# Altium PCB PCB.PcbDoc (part 1 of 3)
Units mm, origin at the board's own origin, x right, y up, seen from the top; angles counter-clockwise.
Board outline 145 x 65 mm, 4 copper layers (Top Layer, GND, VDD, Bottom Layer), stack 1.565 mm thick; 229 components, 167 nets, 739 pads, 265 vias.
Unrouted connection lines stored in the file: 1.
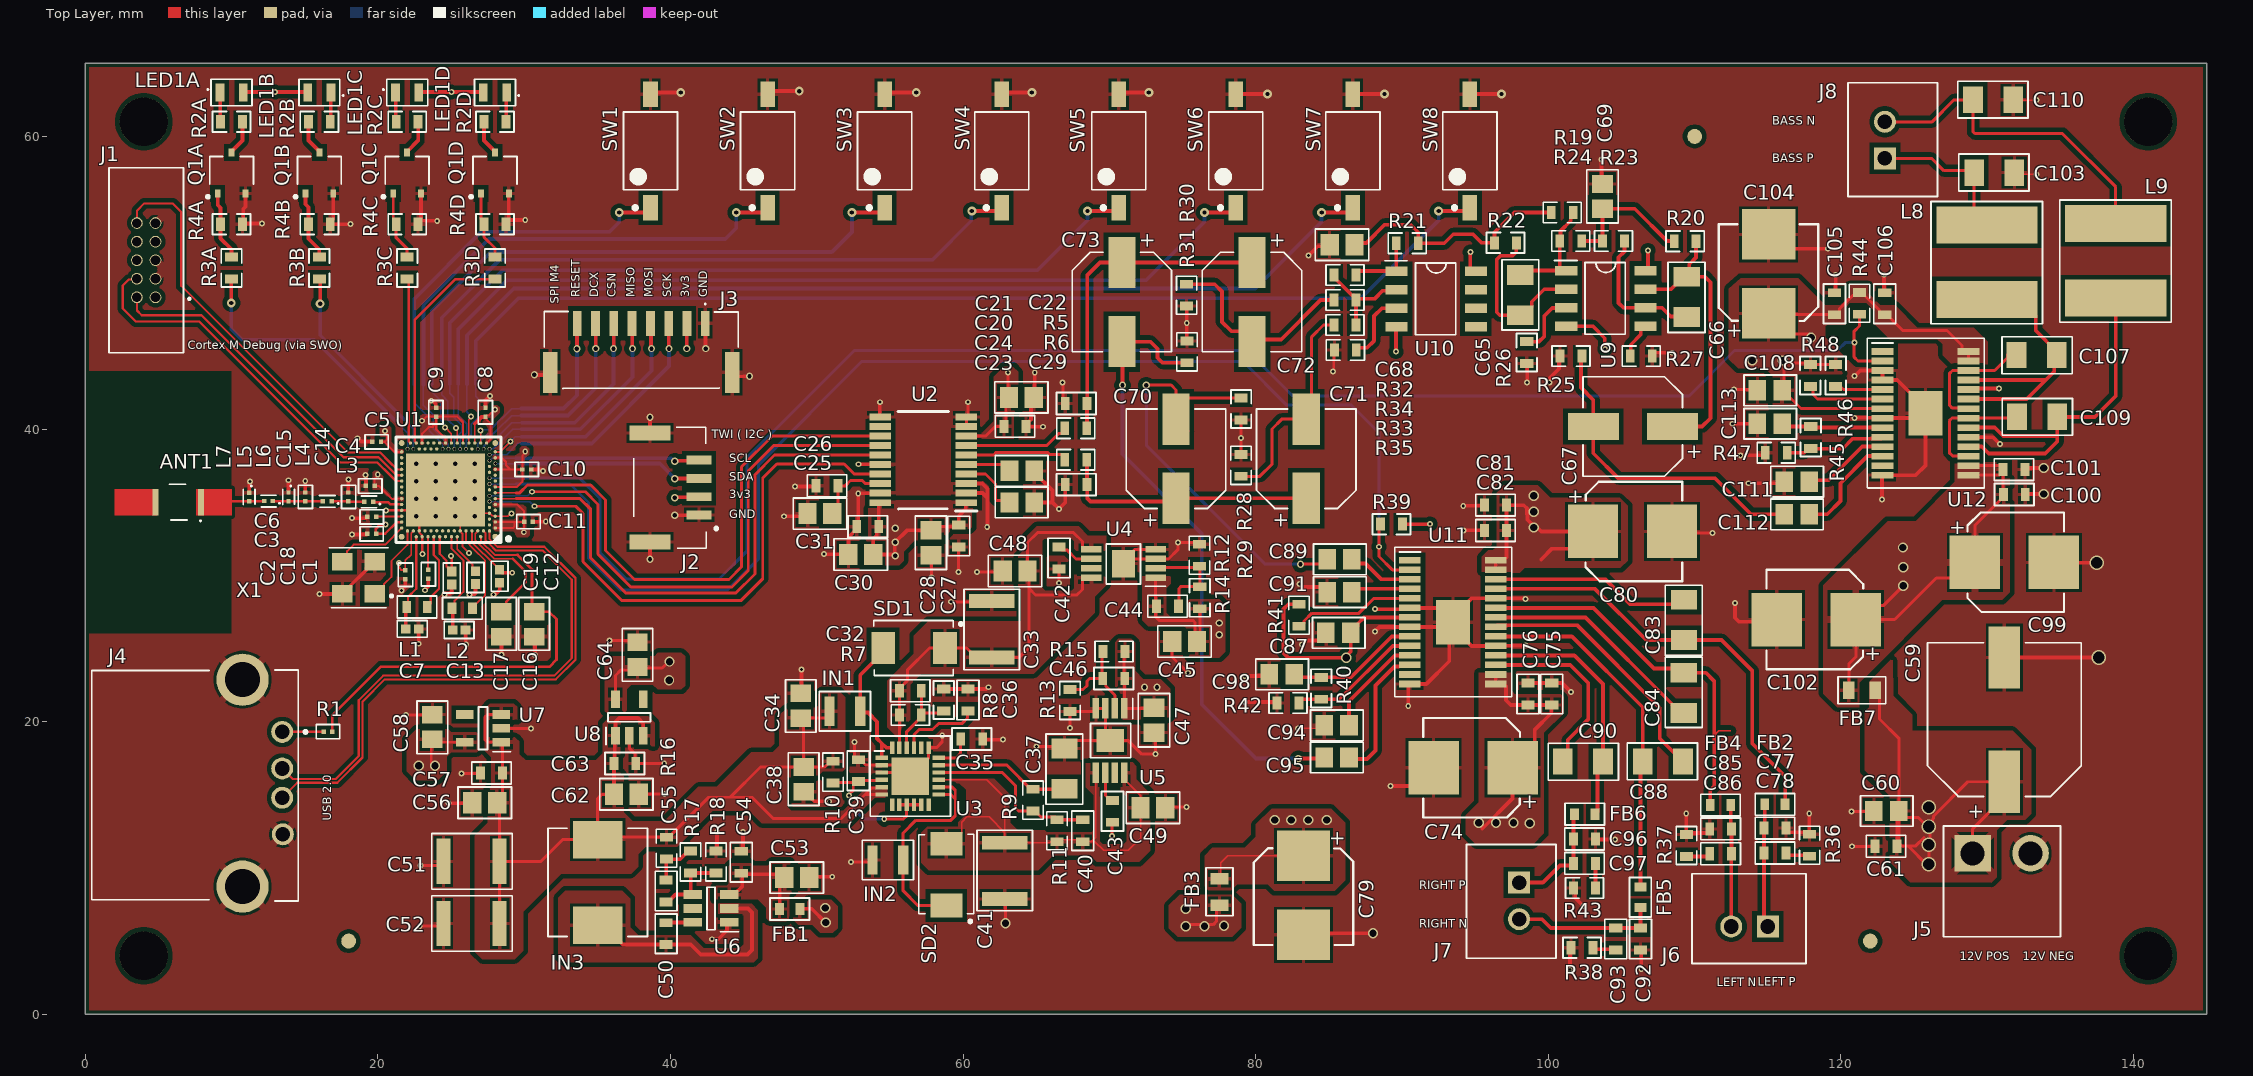
[diagram p0: Top Layer view]
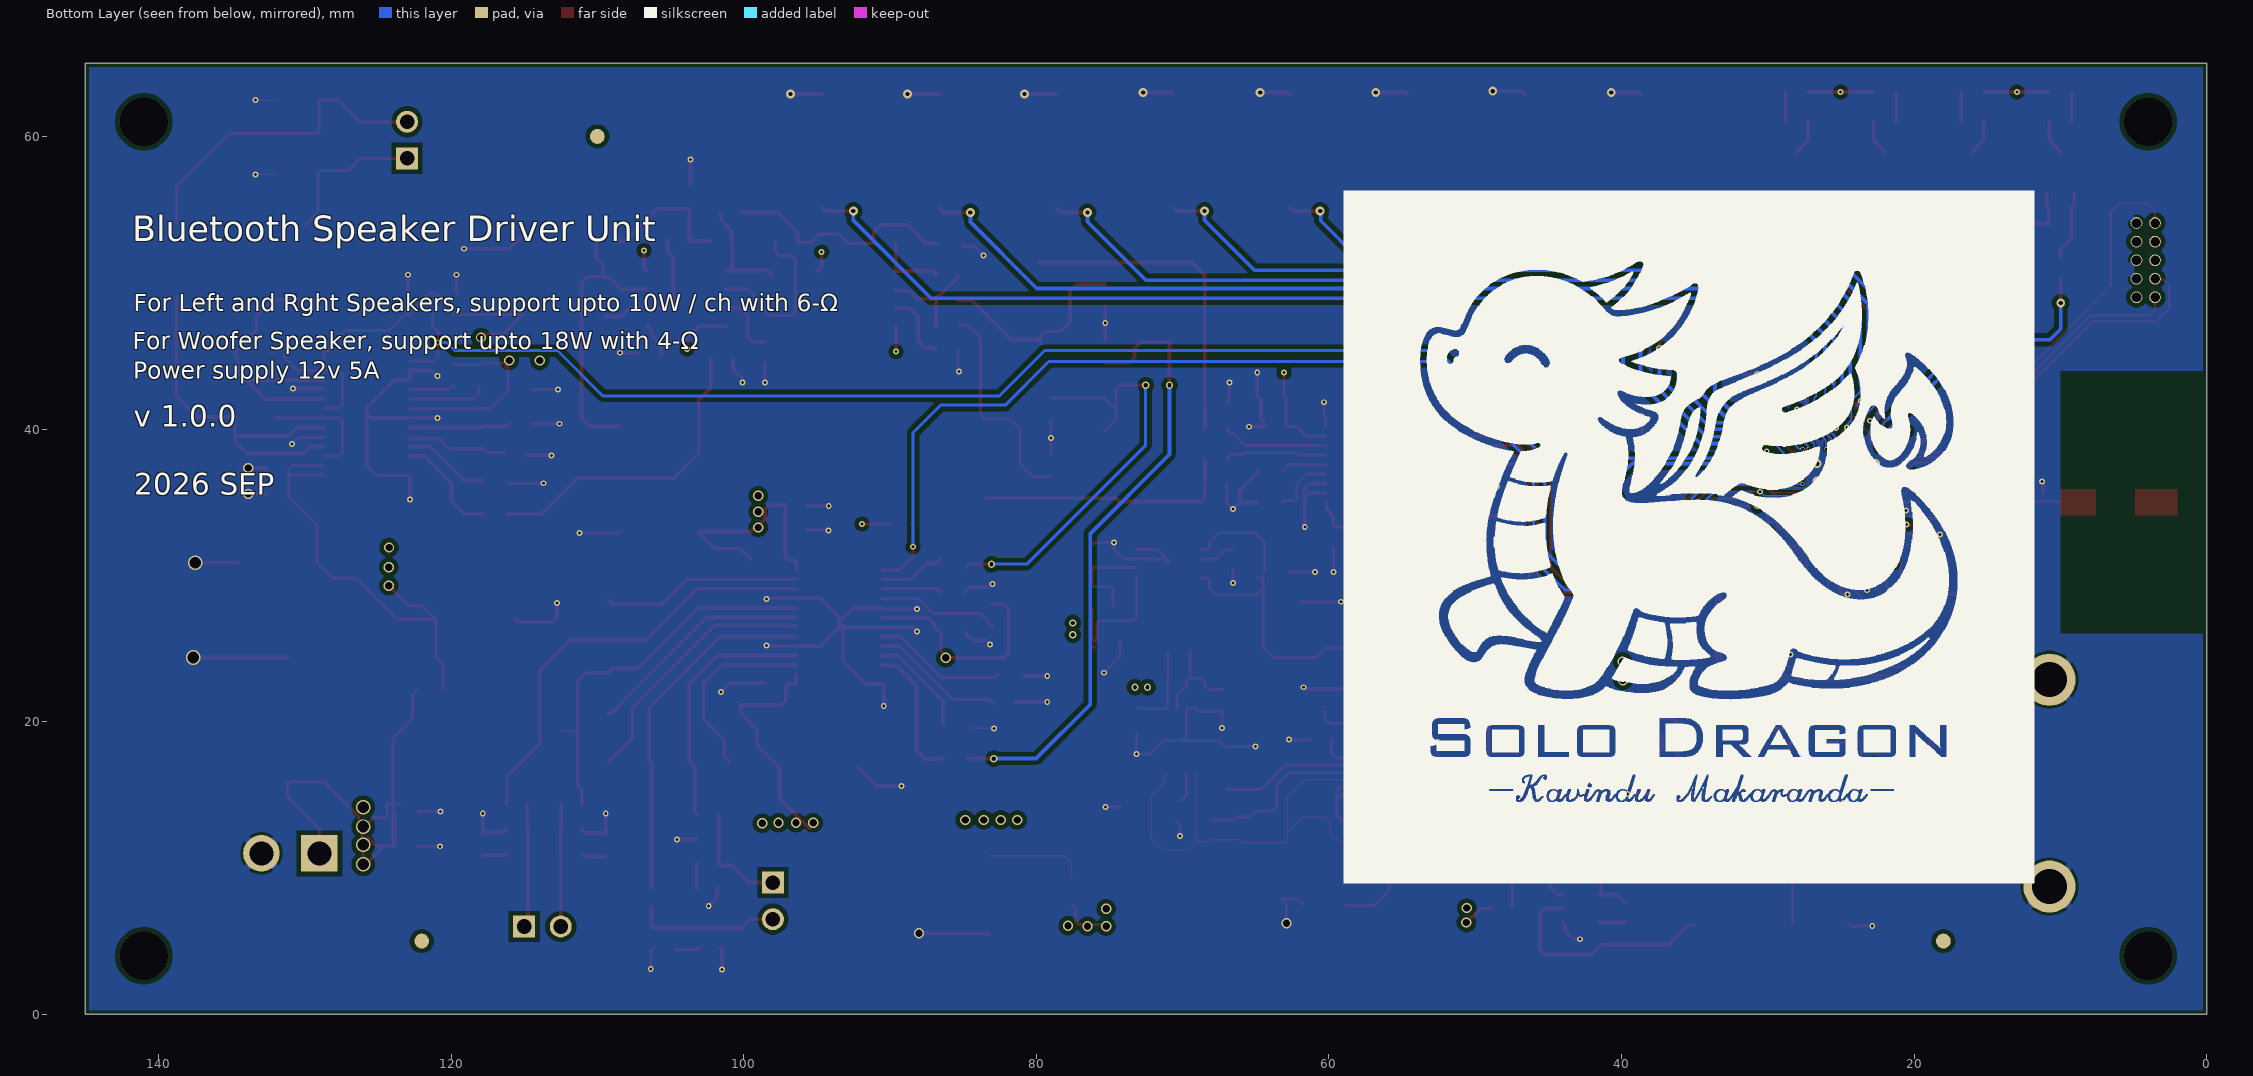
[diagram p1: Bottom Layer view, seen from below]
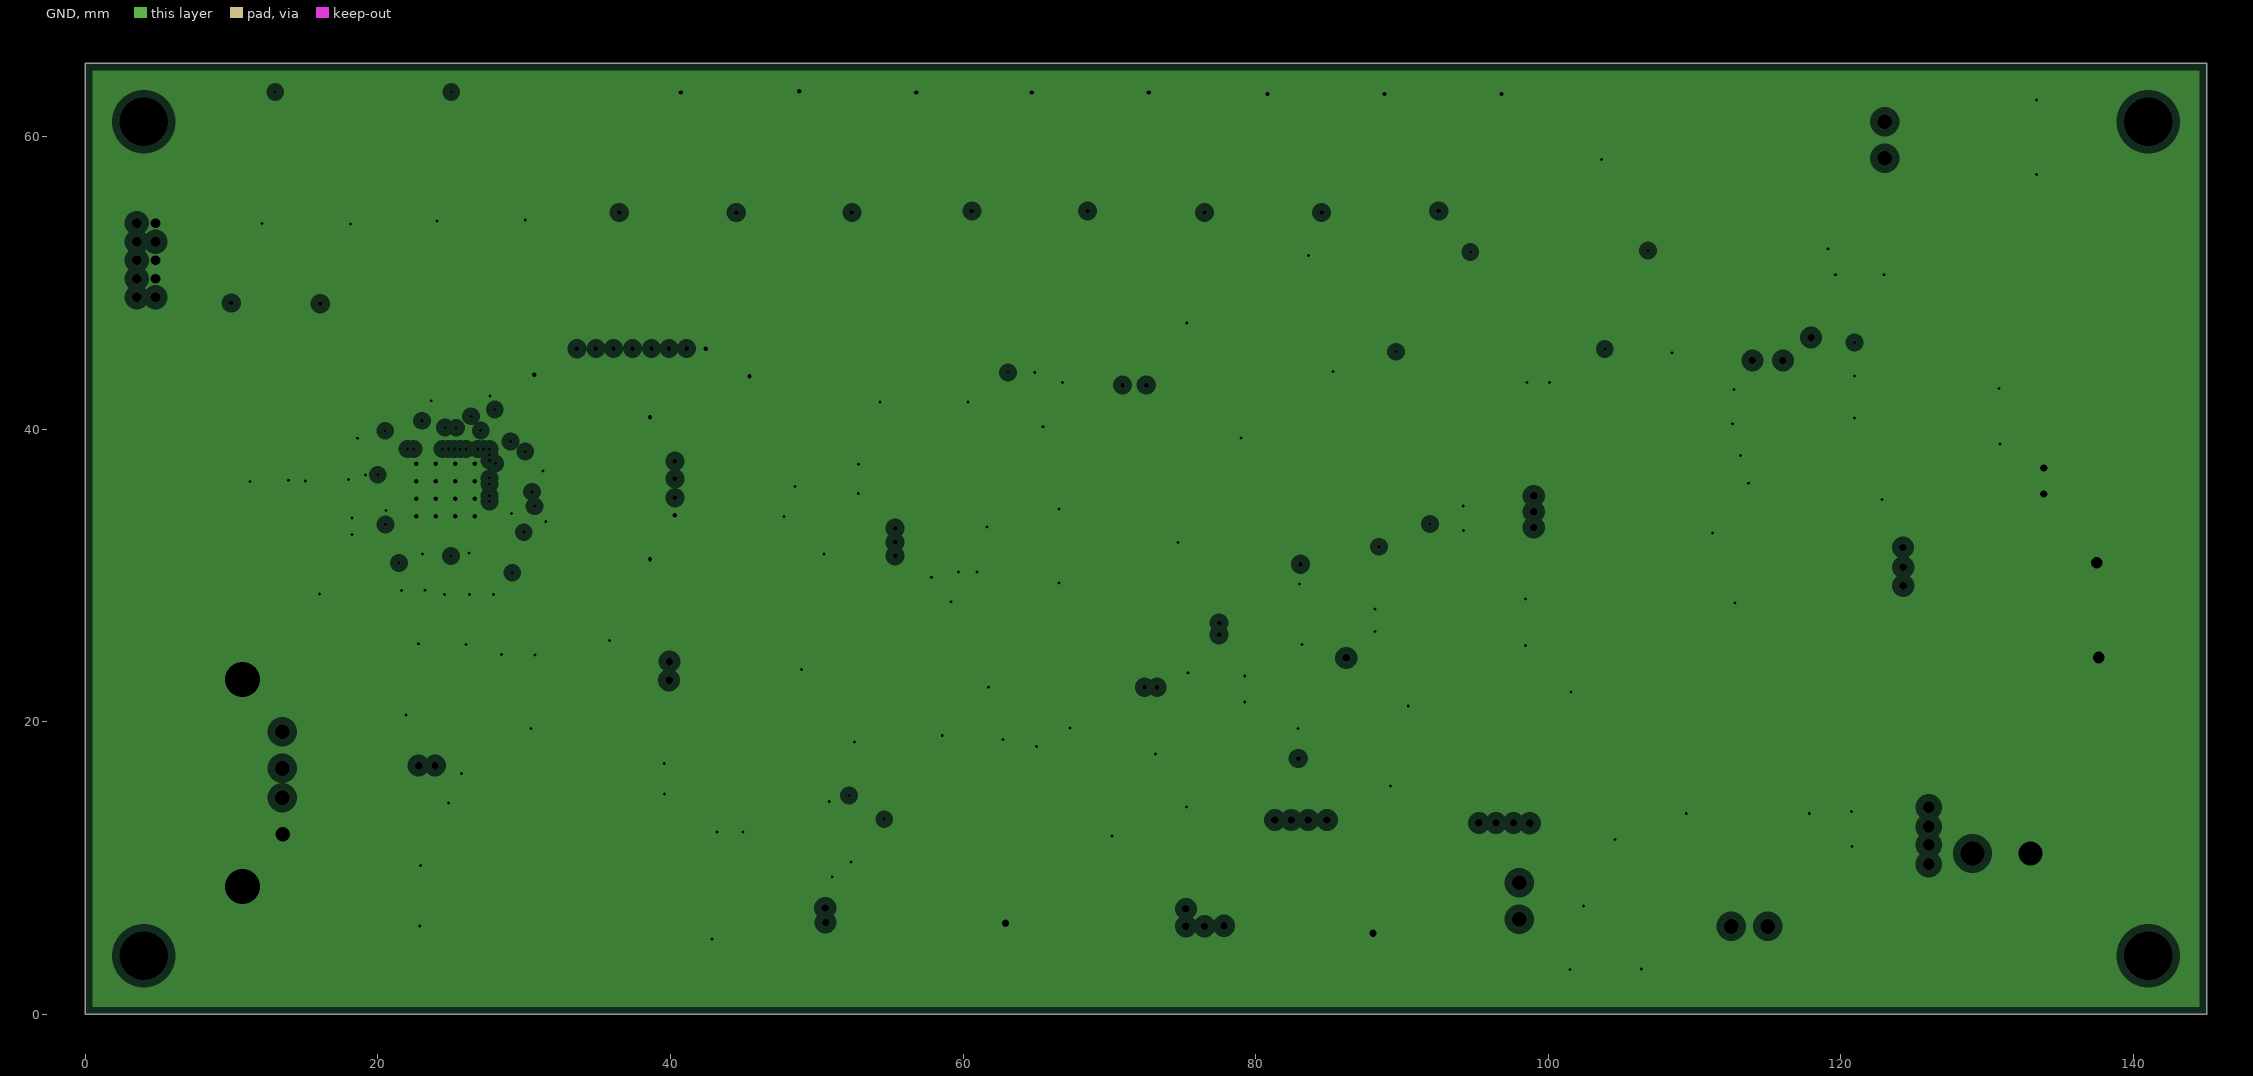
[diagram p2: GND, clearances drawn from the general rule]
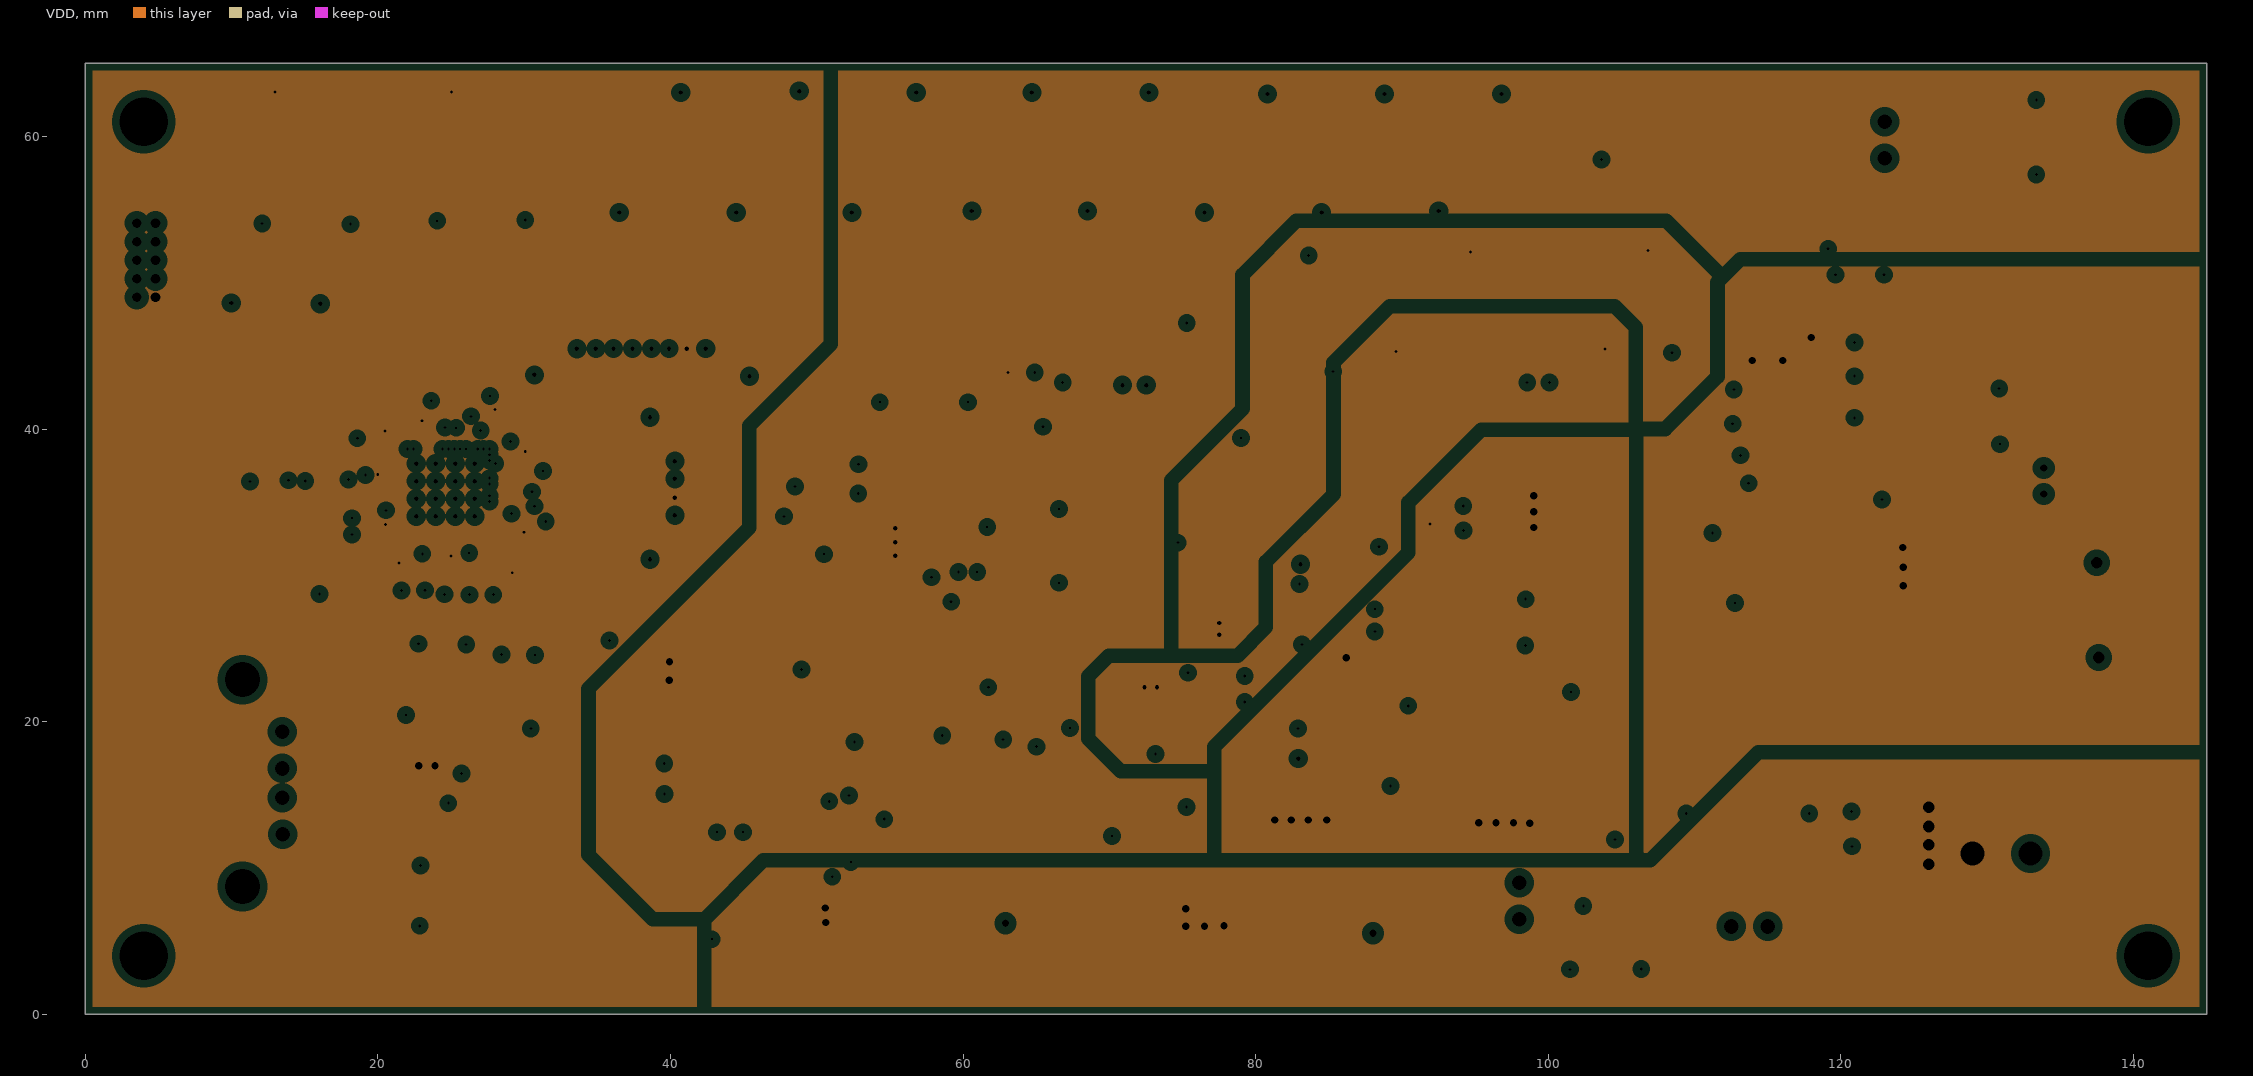
[diagram p3: VDD, clearances drawn from the general rule]
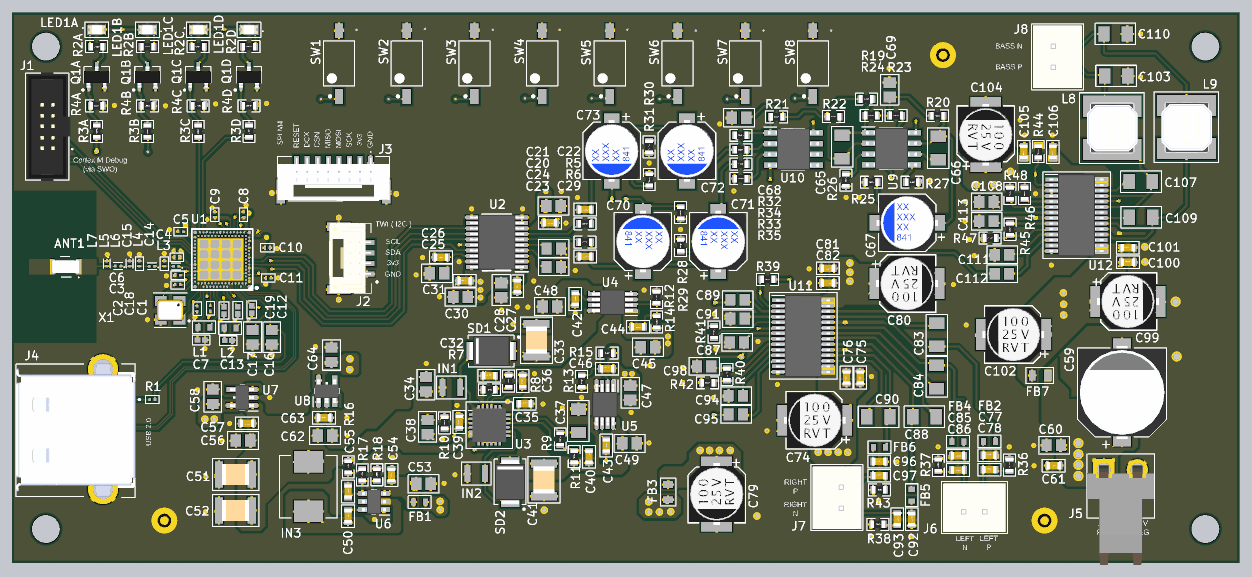
[diagram p6: 3D render of the assembled board from above, using the file's embedded part models]

## Layer stack, top to bottom
Top Solder: solder mask 0.0102, Solder Resist, Dk 3.5
Top Layer: signal copper 0.0356
Dielectric 3: prepreg 0.0994, PP-015, Dk 4.1
GND: plane copper 0.0152, net GND
Dielectric 1: core 1.265, FR-4, Dk 4.8
VDD: plane copper 0.0152
Dielectric 4: prepreg 0.0994, PP-015, Dk 4.1
Bottom Layer: signal copper 0.0356
Bottom Solder: solder mask 0.0102, Solder Resist, Dk 3.5

## Board outline
-0.001,0 -0.001,65 144.999,65 144.999,0

## Design rules (kind name [scope] priority, off if disabled: settings)
AssemblyTestpoint [All] p1: testpointundercomponent=FALSE minsize=1.016 maxsize=2.54 preferedsize=1.524 minholesize=0 maxholesize=1.016 preferedholesize=0.813 testpointgrid=0.025 usegrid=FALSE gridtolerance=0 allowsidebottom=TRUE
BoardOutlineClearance [All] p1: gap=0.254 ignorepadtopadclearanceinfootprint=FALSE except(0: Arc-SplitContinuation Track-SplitContinuation SMDPad-SplitContinuation THPad-SplitContinuation Via-SplitContinuation Fill-SplitContinuation Poly-SplitContinuation Region-SplitContinuation Text-SplitContinuation)
Clearance Clearance_TP [InComponentClass('Test_Points')] p1: gap=0.127 ignorepadtopadclearanceinfootprint=FALSE except(0: Arc-SMDPad Track-SMDPad)
Clearance Clearance_nRF5340 [WithinRoom('nRF5340')] p2: gap=0.076 ignorepadtopadclearanceinfootprint=FALSE
Clearance [All] p3: gap=0.254 ignorepadtopadclearanceinfootprint=FALSE except(0.1: Arc-Arc Arc-Track Arc-SMDPad Track-Track Track-SMDPad; 0.127: Arc-Via Track-Via SMDPad-Fill SMDPad-Region; 0.15: Arc-Text Track-Text SMDPad-SMDPad SMDPad-THPad SMDPad-Text THPad-Text Via-Text Fill-Text Poly-Text Region-Text Text-Text Text-Hole; 0.152: SMDPad-Via; 0.2: Arc-Hole Track-Hole SMDPad-Hole THPad-Hole Via-Via Via-Hole Fill-Hole Poly-Hole Region-Hole; 0.3: Arc-Poly Track-Poly SMDPad-Poly THPad-Poly Via-Poly Fill-Poly Poly-Poly; 0.35: Arc-THPad Track-THPad; 0.45: THPad-THPad)
ComponentClearance [All] p1: gap=0 collisioncheckmode=3 verticalgap=0 showdistances=FALSE
DiffPairsRouting [All] p1: maxlimit=0.114 minlimit=0.114 mostfreqgap=0.114 toplayer_minwidth=0.141 toplayer_maxwidth=0.141 toplayer_prefwidth=0.141 bottomlayer_minwidth=0.141 bottomlayer_maxwidth=0.141 bottomlayer_prefwidth=0.141 impedanceprofiledriven=TRUE impedanceprofileid={7527A74F-FD35-4570-81B9-83ADDE29F662} impedanceprofilevalue=90.000000 maxuncoupledlength=12.7
HoleSize HoleSize_nRF5340 [WithinRoom('nRF5340')] p1: absolutevalues=TRUE maxlimit=0.5 minlimit=0.2 maxpercent=80.000 minpercent=20.000
HoleSize [All] p2: absolutevalues=TRUE maxlimit=6.3 minlimit=0.2 maxpercent=80.000 minpercent=20.000
HoleToHoleClearance HoleToHoleClearance_nRF5340 [All] p1: gap=0.2 allowstackedmicrovias=TRUE
HoleToHoleClearance [All] p2: gap=0.45 allowstackedmicrovias=TRUE
MatchedLengths MatchedLengths_USB [InDifferentialPairClass('All Differential Pairs')] p1: tolerance=25.4 checknetsindiffpair=FALSE checkdiffpairvsdiffpair=TRUE checkxsignals=TRUE checkothers=TRUE usedelayunits=TRUE delaytolerance=100.000000
MatchedLengths MatchedLengths_SPI [InNetClass('SPI')] p2: tolerance=25.4 checknetsindiffpair=FALSE checkdiffpairvsdiffpair=TRUE checkxsignals=TRUE checkothers=TRUE usedelayunits=TRUE delaytolerance=200.000000
MinimumAnnularRing [All] p1: minimumring=0
MinimumSolderMaskSliver [All] p1: minsoldermaskwidth=0.15
PlaneClearance [All] p1: clearance=0.508
PlaneConnect [All] p1: planeconnectstyle=Relief reliefexpansion=0.508 reliefentries=4 reliefconductorwidth=0.254 reliefairgap=0.254
PolygonConnect [All] p1: thpad.connectstyle=Relief thpad.reliefconductorwidth=0.508 thpad.reliefentries=4 thpad.polygonreliefangle="45 Angle" thpad.airgapwidth=0.178 smdpad.connectstyle=Relief smdpad.reliefconductorwidth=0.254 smdpad.reliefentries=4 smdpad.polygonreliefangle="90 Angle" smdpad.airgapwidth=0.178 via.connectstyle=Direct via.reliefconductorwidth=0.254 via.reliefentries=4 via.polygonreliefangle="90 Angle" via.airgapwidth=0.254
RoomDefinition nRF5340 [InComponentClass('Room Definition1')] p1: confinementstyle=ConfineIn formatcopy=TRUE lockcomponents=FALSE outline 20.796,31.813 20.796,39.871 29.429,39.871 29.429,31.813
RoutingVias [All] p1: holewidth=0.2 width=0.403 viastyle="Through Hole" minholewidth=0.15 minwidth=0.25 maxholewidth=0.8 maxwidth=1.003
SilkToSilkClearance [All] p1: silktosilkclearance=0.15
SilkToSolderMaskClearance [IsPad] p1: minsilkscreentomaskgap=0.15 clearancetoexposedcopper=TRUE
SolderMaskExpansion [All] p1: expansion=0.1 istentingtop=FALSE
ViasUnderSMD [WithinRoom('nRF5340')] p1: allowed=TRUE
Width Width_nRF5340 [WithinRoom('nRF5340')] p1: maxlimit=0.254 minlimit=0.076 preferedwidth=0.127
Width Width_RF [InNetClass('RF')] p2: maxlimit=0.17 minlimit=0.17 preferedwidth=0.17 impedanceprofiledriven=TRUE impedanceprofileid={C1EED083-1B7E-4951-A5C6-58A9AB6F2C80} impedanceprofilevalue=50.000000 minimp=50.000000 maximp=50.000000 favimp=50.000000
Width [InNetClass('All Nets')] p3: maxlimit=1.27 minlimit=0.064 preferedwidth=0.203
20 further rules are at their usual default settings.

## Classes and differential pairs
net class SPI: "P0.08 / TRACEDATA3" "P0.09 / TRACEDATA2" "P0.10 / TRACEDATA1"
net class RF: NetC14_1 RF RF_A RF_B
channel class LED_Indicator: U_LED_Indicator_?1 U_LED_Indicator_?2 U_LED_Indicator_?3 U_LED_Indicator_?4
component class U_Power_Section: C50 C51 C52 C53 C54 C55 C56 C57 C58 C59 C60 C61 C62 C63 C64 FB1 IN3 J5 R16 R17 R18 U6 U7 U8
component class U_Power_amp_Stereo_L&R: C74 C75 C76 C77 C78 C79 C80 C81 C82 C83 C84 C85 C86 C87 C88 C89 C90 C91 C92 C93 C94 C95 C96 C97 C98 FB2 FB3 FB4 FB5 FB6 J6 J7 R36 R37 R38 R39 R40 R41 R42 R43 U11
component class U_Power_amp_Bass: C99 C100 C101 C102 C103 C104 C105 C106 C107 C108 C109 C110 C111 C112 C113 FB7 J8 L8 L9 R44 R45 R46 R47 R48 U12
component class U_nRF5340: C1 C2 C3 C4 C5 C6 C7 C8 C9 C10 C11 C12 C13 C14 C15 C16 C17 C18 C19 J1 J2 J3 J4 L1 L2 L3 L4 L5 L6 L7 R1 SW1 SW2 SW3 SW4 SW5 SW6 SW7 SW8 U1 X1
component class U_LOW_PASS_FILTER: C65 C66 C67 C68 C69 R19 R20 R21 R22 R23 R24 R25 R26 R27 U9
component class U_LED_Indicator_?4: LED1D Q1D R2D R3D R4D
component class U_LED_Indicator_?3: LED1C Q1C R2C R3C R4C
component class U_LED_Indicator_?2: LED1B Q1B R2B R3B R4B
component class U_LED_Indicator_?1: LED1A Q1A R2A R3A R4A
component class U_DAC: C20 C21 C22 C23 C24 C25 C26 C27 C28 C29 C30 C31 R5 R6 U2
component class U_AMP: C70 C71 C72 C73 R28 R29 R30 R31 R32 R33 R34 R35 U10
component class "U_5v negative and positive channels": C32 C33 C34 C35 C36 C37 C38 C39 C40 C41 C42 C43 C44 C45 C46 C47 C48 C49 IN1 IN2 R7 R8 R9 R10 R11 R12 R13 R14 R15 SD1 SD2 U3 U4 U5
differential pair D: +D_P -D_N

## Components (designator, comment, footprint, x,y, rotation, side; value= is the part's Value field where it differs from the comment)
ANT1 "ANT3216_2.45GHz" ANT3216_2.4GHz 6.35,35.001 r180 top locked
C1 "1uF" CAPC0402X06N 25.048,29.818 r90 top locked
C2 "100nF" CAPC0201X03N 21.875,30.042 r90 top locked
C3 "100nF" CAPC0201X03N 19.575,32.842 r0 top locked
C4 "100nF" CAPC0201X03N 19.482,36.119 r0 top locked
C5 "100nF" CAPC0201X03N 19.914,39.141 r0 top locked
C6 "2.2nF" CAPC0201X03N 19.583,34.011 r0 top locked
C7 "1uF" CAPC0402X06N 22.352,26.34 r180 top locked
C8 "100nF" CAPC0201X03N 27.356,41.148 r270 top locked
C9 "100nF" CAPC0201X03N 23.978,41.148 r270 top locked
C10 "100nF" CAPC0201X03N 30.17,37.236 r180 top locked
C11 "100nF" CAPC0201X03N 30.297,33.655 r180 top locked
C12 "1uF" CAPC0402X06N 28.321,29.938 r90 top locked
C13 "1uF" CAPC0402X06N 25.552,26.264 r180 top locked
C14 "0.7pF" CAPC0201X03N 17.983,35.362 r90 top locked
C15 "NC" CAPC0201X03N 15.037,35.362 r90 top locked
C16 "4.7uF" CAP0805X13N 30.683,26.658 r90 top locked
C17 "4.7uF" CAP0805X13N 28.423,26.658 r90 top locked
C18 "100nF" CAPC0201X03N 23.444,30.074 r90 top locked
C19 "1uF" CAPC0402X06N 26.67,29.845 r90 top locked
C20 "100pF" CAPC0603X8N 63.551,40.183 r0 top locked
C21 "10uF" CAPC0805X14N 63.983,42.164 r0 top locked
C22 "2.2nF" CAPC0603X8N 67.725,41.75 r0 top locked
C23 "2.2uF" CAP0805X13N 64.018,34.979 r180 top locked
C24 "2.2uF" CAP0805X13N 64.018,37.138 r180 top locked
C25 "10uF" CAPC0805X14N 50.214,34.217 r0 top locked
C26 "100pF" CAPC0603X8N 50.695,36.122 r0 top locked
C27 "100pF" CAPC0603X8N 59.7,32.693 r270 top locked
C28 "10uF" CAPC0805X14N 57.795,32.224 r270 top locked
C29 "2.2nF" CAPC0603X8N 67.725,36.2 r0 top locked
C30 "10uF" CAPC0805X14N 53.008,31.423 r180 top locked
C31 "100pF" CAPC0603X8N 53.477,33.328 r180 top locked
C32 "22pF" CAPC0603X8N 56.394,22.113 r180 top locked
C33 "22uF" CAPC1210X25N 61.955,26.32 r270 top locked
C34 "4.7uF" CAP0805X13N 48.901,21.097 r270 top locked
C35 "4.7nF" CAPC0603X8N 60.585,18.811 r180 top locked
C36 "10nF" CAPC0603X8N 60.331,21.478 r270 top locked
C37 "220nF" CAPC1206X18N 66.933,16.784 r270 top locked
C38 "4.7uF" CAP0805X13N 49.1,16.05 r90 top locked
C39 "100nF" CAPC0603X8N 52.838,16.652 r270 top locked
C40 "22pF" CAPC0603X8N 68.174,12.548 r90 top
C41 "22uF" CAPC1210X25N 62.85,9.8 r90 top locked
C42 "10nF" CAPC0603X8N 66.548,31.191 r90 top
C43 "10nF" CAPC0603X8N 70.206,13.868 r90 top locked
C44 "10nF" CAPC0603X8N 73.965,27.889 r0 top
C45 "10uF" CAPC0805X14N 75.133,25.476 r180 top
C46 "10nF" CAPC0603X8N 70.3,22.95 r180 top locked
C47 "10uF" CAPC0805X14N 73.05,20.1 r270 top locked
C48 "10uF" CAPC0805X14N 63.55,30.3 r0 top locked
C49 "10uF" CAPC0805X14N 72.974,14.122 r180 top locked
C50 "100nF" CAPC0603X8N 39.7,5.512 r90 top locked
C51 "22uF" CAPC1210X25N 26.4,10.45 r0 top locked
C52 "22uF" CAPC1210X25N 26.4,6.2 r0 top locked
C53 "10uF" CAPC0805X14N 48.623,9.341 r180 top locked
C54 "100nF" CAPC0603X8N 44.831,10.389 r270 top locked
C55 "75pF" CAPC0603X8N 39.7,8.433 r90 top locked
C56 "10uF" CAPC0805X14N 27.3,14.45 r0 top locked
C57 "100nF" CAPC0603X8N 27.762,16.485 r0 top locked
C58 "1uF" CAP0805X13N 23.724,19.634 r270 top locked
C59 "470uF" CAPD10XL11.1X10.2M 131.166,20.142 r90 top
C60 "1uF" CAP0805X13N 123.101,13.893 r0 top locked
C61 "100nF" CAPC0603X8N 123.076,11.487 r0 top locked
C62 "10uF" CAPC0805X14N 36.982,15.037 r180 top locked
C63 "100nF" CAPC0603X8N 36.881,17.145 r180 top locked
C64 "1uF" CAP0805X13N 37.744,24.587 r270 top locked
C65 "100nF" CAPC1206X18N 98.075,49.15 r90 top locked
C66 "100nF" CAPC1206X18N 109.45,49.025 r270 top locked
C67 "10uF" CAPD6.3XL5.8X61M 105.775,40.175 r180 top locked
C68 "390nF" CAPC0805X14N 85.9,52.6 r0 top locked
C69 "390nF" CAPC0805X14N 103.7,55.9 r90 top locked
C70 "10uF" CAPD6.3XL5.8X61M 74.55,37.975 r90 top locked
C71 "10uF" CAPD6.3XL5.8X61M 83.45,37.975 r90 top locked
C72 "10uF" CAPD6.3XL5.8X61M 79.75,48.675 r270 top locked
C73 "10uF" CAPD6.3XL5.8X61M 70.85,48.675 r270 top locked
C74 "100uF" CAPD6.3XL6.3X77M 94.85,16.85 r180 top locked
C75 "100nF" CAPC0603X8N 100.228,21.895 r270 top locked
C76 "1nF" CAPC0603X8N 98.603,21.895 r270 top locked
C77 "1nF" CAPC0603X8N 115.483,12.722 r180 top locked
C78 "1nF" CAPC0603X8N 115.483,11.022 r180 top locked
C79 "220uF" CAPD6.3XL6.3X77M 83.261,8.128 r270 top locked
C80 "100uF" CAPD6.3XL6.3X77M 105.75,33 r0 top locked
C81 "100nF" CAPC0603X8N 96.393,34.798 r0 top
C82 "1nF" CAPC0603X8N 96.393,33.071 r0 top
C83 "220nF" CAPC1206X18N 109.271,26.949 r270 top
C84 "220nF" CAPC1206X18N 109.245,21.971 r90 top
C85 "1nF" CAPC0603X8N 111.773,12.672 r0 top locked
C86 "1nF" CAPC0603X8N 111.773,10.972 r0 top locked
C87 "1uF" CAP0805X13N 85.649,26.06 r0 top
C88 "220nF" CAPC1206X18N 107.823,17.272 r180 top locked
C89 "1uF" CAP0805X13N 85.726,31.084 r0 top locked
C90 "220nF" CAPC1206X18N 102.362,17.272 r0 top locked
C91 "1uF" CAP0805X13N 85.726,28.859 r0 top locked
C92 "1nF" CAPC0603X8N 106.3,5.15 r90 top locked
C93 "1nF" CAPC0603X8N 104.6,5.15 r90 top locked
C94 "1uF" CAP0805X13N 85.525,19.75 r0 top locked
C95 "1uF" CAP0805X13N 85.525,17.55 r0 top locked
C96 "1nF" CAPC0603X8N 102.475,11.975 r180 top locked
C97 "1nF" CAPC0603X8N 102.464,10.312 r180 top locked
C98 "1uF" CAP0805X13N 81.775,23.225 r0 top locked
C99 "100uF" CAPD6.3XL6.3X77M 131.851,30.886 r0 top locked
C100 "100nF" CAPC0603X8N 131.85,35.525 r180 top locked
C101 "1nF" CAPC0603X8N 131.825,37.225 r180 top locked
C102 "220uF" CAPD6.3XL6.3X77M 118.313,26.975 r180 top
C103 "680nF" CAPC1206X18N 130.475,57.525 r180 top locked
C104 "100uF" CAPD6.3XL6.3X77M 115.05,50.6 r90 top locked
C105 "100nF" CAPC0603X8N 119.558,48.565 r270 top locked
C106 "1nF" CAPC0603X8N 122.987,48.565 r270 top locked
C107 "470nF" CAPC1206X18N 133.375,45.06 r0 top locked
C108 "1uF" CAP0805X13N 115.138,42.647 r0 top locked
C109 "470nF" CAPC1206X18N 133.401,40.843 r0 top locked
C110 "680nF" CAPC1206X18N 130.4,62.5 r180 top locked
C111 "1uF" CAP0805X13N 116.975,36.4 r0 top locked
C112 "1uF" CAP0805X13N 116.967,34.163 r0 top locked
C113 "1uF" CAP0805X13N 115.138,40.361 r0 top locked
FB1 "FB_3A" FB0603X08N 48.158,7.188 r180 top locked
FB2 "FB_3A" FB0603X08N 115.483,14.347 r180 top locked
FB3 "FB_6A" FB0805X12N 77.521,8.357 r90 top locked
FB4 "FB_3A" FB0603X08N 111.76,14.3 r0 top locked
FB5 "FB_3A" FB0603X08N 106.3,8 r270 top locked
FB6 "FB_3A" FB0603X08N 102.489,13.665 r180 top locked
FB7 "FB_6A" FB0805X12N 121.437,22.149 r180 top
IN1 "4.7uH" INDC2520X10N 51.915,20.716 r0 top locked
IN2 "4.7uH" INDC2520X10N 54.85,10.55 r180 top locked
IN3 "15uH" INDM7266X30N 35.024,9.011 r90 top locked
J1 "SWD_CONN_2X5P_1.27MM" "CONN_2X5P_1.27MM - duplicate" 4.8,49 r90 top locked
J2 "JST_GH_4_PIN" JST_GH_4_PIN 40,36 r270 top locked
J3 "JST_GH_8_PIN" JST_GH_8_PIN 38,45 r0 top locked
J4 "USB_TYPE_A_FE" USB_TYPE_A_FE 7.8,15.8 r270 top locked
J5 "JST_S2P_VH" JST_S2P_VH 129,11 r0 top locked
J6 "JST_B2B-XH-A-GU" JST_B2B_XH_A_GU 115,6 r180 top locked
J7 "JST_B2B-XH-A-GU" JST_B2B_XH_A_GU 98,9 r270 top locked
J8 "JST_B2B-XH-A-GU" JST_B2B_XH_A_GU 123,58.5 r90 top locked
L1 "10uH" INDC0603X08N 22.675,27.842 r0 top locked
L2 "10uH" INDC0603X08N 25.775,27.742 r0 top locked
L3 "2.2nH" INDC0201 19.38,35.027 r180 top locked
L4 "2.2nH" INDC0201 16.535,35.052 r180 top locked
L5 "1.5nH" INDC0201 12.522,35.077 r180 top locked
L6 "NC" INDC0201 13.894,35.362 r270 top locked
L7 "1.8nH" INDC0201 11.201,35.357 r270 top locked
L8 "10uH" INDC6060X45N 129.975,51.4 r90 top locked
L9 "10uH" INDC6060X45N 138.775,51.5 r90 top locked
LED1A "LED_YELLOW" LED_0805_127P120X200-2N 10,63 r0 top locked (schematic designator LED1)
LED1B "LED_YELLOW" LED_0805_127P120X200-2N 16,63 r180 top locked (schematic designator LED1)
LED1C "LED_YELLOW" LED_0805_127P120X200-2N 22,63 r0 top locked (schematic designator LED1)
LED1D "LED_YELLOW" LED_0805_127P120X200-2N 28,63 r180 top locked (schematic designator LED1)
Q1A "AO3400A" SOT23_P240X110-3N 10,57.5 r90 top locked (schematic designator Q1)
Q1B "AO3400A" SOT23_P240X110-3N 16,57.5 r90 top locked (schematic designator Q1)
Q1C "AO3400A" SOT23_P240X110-3N 22,57.5 r90 top locked (schematic designator Q1)
Q1D "AO3400A" SOT23_P240X110-3N 28,57.5 r90 top locked (schematic designator Q1)
R1 "2.2 ohm" CAPC0201X03N 16.591,19.304 r180 top
R2A "50 ohm" RECS0603X45N 10,61 r180 top locked (schematic designator R2)
R2B "50 ohm" RECS0603X45N 16,61 r0 top locked (schematic designator R2)
R2C "50 ohm" RECS0603X45N 22,61 r180 top locked (schematic designator R2)
R2D "50 ohm" RECS0603X45N 28,61 r0 top locked (schematic designator R2)
R3A "100 ohm" RECS0603X45N 10,51 r90 top locked (schematic designator R3)
R3B "100 ohm" RECS0603X45N 16,51 r90 top locked (schematic designator R3)
R3C "100 ohm" RECS0603X45N 22,51 r90 top locked (schematic designator R3)
R3D "100 ohm" RECS0603X45N 28,51 r90 top locked (schematic designator R3)
R4A "100k" RECS0603X45N 10,54 r0 top locked (schematic designator R4)
R4B "100k" RECS0603X45N 16,54 r0 top locked (schematic designator R4)
R4C "100k" RECS0603X45N 22,54 r0 top locked (schematic designator R4)
R4D "100k" RECS0603X45N 28,54 r0 top locked (schematic designator R4)
R5 "470 ohm" RECS0603X45N 67.701,40.059 r0 top locked
R6 "470 ohm" RECS0603X45N 67.701,37.9 r0 top locked
R7 "510K" RECS0603X45N 56.394,20.462 r0 top locked
R8 "130K" RECS0603X45N 58.68,21.478 r90 top locked
R9 "100k" RECS0603X45N 64.774,14.637 r90 top locked
R10 "100 ohm" RECS0603X45N 51.1,16.55 r270 top locked
R11 "510K" RECS0603X45N 66.421,12.548 r90 top
R12 "100k" RECS0603X45N 76.15,31.375 r90 top locked
R13 "100k" RECS0603X45N 67.3,21.45 r270 top locked
R14 "320k" RECS0603X45N 76.175,28.473 r90 top
R15 "324k" RECS0603X45N 70.307,24.79 r180 top locked
R16 "49.9 ohm" RECS0603X45N 39.726,11.354 r90 top locked
R17 "100k" RECS0603X45N 41.374,10.408 r90 top locked
R18 "13.3k" RECS0603X45N 43.104,10.414 r270 top locked
R19 "11k" RECS0603X45N 100.95,54.8 r0 top locked
R20 "11k" RECS0603X45N 109.347,52.832 r0 top
R21 "11k" RECS0603X45N 90.35,52.7 r0 top locked
R22 "5.6k" RECS0603X45N 97.075,52.725 r0 top locked
R23 "5.6k" RECS0603X45N 104.45,52.85 r0 top locked
R24 "11k" RECS0603X45N 101.525,52.85 r0 top locked
R25 "100k" RECS0603X45N 101.549,44.983 r0 top locked
R26 "11k" RECS0603X45N 98.525,45.225 r90 top locked
R27 "11k" RECS0603X45N 106.35,44.983 r180 top locked
R28 "100k" RECS0603X45N 79,41.375 r90 top locked
R29 "100k" RECS0603X45N 78.994,37.516 r270 top locked
R30 "100k" RECS0603X45N 75.275,49.15 r90 top locked
R31 "100k" RECS0603X45N 75.3,45.275 r270 top locked
R32 "4.7k" RECS0603X45N 86.106,50.521 r180 top locked
R33 "10k" RECS0603X45N 86.106,47.117 r0 top locked
R34 "10k" RECS0603X45N 86.106,48.819 r0 top locked
R35 "4.7k" RECS0603X45N 86.125,45.4 r0 top locked
R36 "68 ohm" RECS0603X45N 117.856,11.557 r270 top locked
R37 "68 ohm" RECS0603X45N 109.449,11.532 r270 top locked
R38 "68 ohm" RECS0603X45N 102.3,4.55 r0 top locked
R39 "100k" RECS0603X45N 89.275,33.5 r180 top locked
R40 "51K" RECS0603X45N 84.475,22.275 r90 top locked
R41 "100k" RECS0603X45N 82.95,27.275 r270 top locked
R42 "39K" RECS0603X45N 82.2,21.275 r0 top locked
R43 "68 ohm" RECS0603X45N 102.475,8.625 r0 top locked
R44 "100k" RECS0603X45N 121.26,48.59 r270 top locked
R45 "51K" RECS0603X45N 117.932,39.421 r90 top locked
R46 "100k" RECS0603X45N 119.634,43.663 r270 top locked
R47 "39K" RECS0603X45N 115.57,38.379 r0 top locked
R48 "100k" RECS0603X45N 117.907,43.663 r270 top locked
SD1 "SCHDIOSMB_1A" SD_SMB_1A 56.648,25.034 r0 top locked
SD2 "SCHDIOSMB_1A" SD_SMB_1A 58.85,9.55 r270 top locked
SW1 "PB_SW" SW_PB_2 38.636,59 r90 top locked
SW2 "PB_SW" SW_PB_2 46.636,59 r90 top locked
SW3 "PB_SW" SW_PB_2 54.636,59 r90 top locked
SW4 "PB_SW" SW_PB_2 62.636,59 r90 top locked
SW5 "PB_SW" SW_PB_2 70.636,59 r90 top locked
SW6 "PB_SW" SW_PB_2 78.636,59 r90 top locked
SW7 "PB_SW" SW_PB_2 86.636,59 r90 top locked
SW8 "PB_SW" SW_PB_2 94.636,59 r90 top locked
U1 "nRF5340-QKAA" AQFN40P700X700X85_HS-99N 24.825,35.842 r180 top locked
U2 "PCM5102APWR" SOP65P640X120-20N 57.287,37.9 r180 top locked
U3 "TPS65131RGER" QFN50P400X400X100-25N-D 56.394,16.271 r0 top locked
U4 "TPS7A4901DGNR" SOP65P490X110-9N 70.95,30.8 r180 top locked
U5 "TPS7A3001DGNR" SOP65P490X110-9N 70.05,18.7 r270 top locked
U6 "TPS54202DDCR" TPS54202DDCR 42.771,7.233 r180 top locked
U7 "TLV75533PDBVR" SOT95P280X145-5N 27.183,19.543 r180 top locked
U8 "TPS7A2033PDBVR" SOT95P280X145-5N 37.186,20.295 r90 top locked
U9 "RC4580IDR" SOIC127P600X175-8N 103.925,48.925 r0 top locked
U10 "RC4580IDR" SOIC127P600X175-8N 92.337,48.895 r0 top locked
U11 "TPA3138D2PWPR" SOP65P640X120-29N 93.475,26.8 r0 top locked
U12 "TPA3138D2PWPR" SOP65P640X120-29N 125.775,41.075 r0 top locked
X1 "32MHz" CRYOSC_3.2X2.5M 18.675,29.842 r180 top locked

## Footprints (in the part's own frame and the unit in brackets; to place one, negate y for a bottom-side part, rotate by r counter-clockwise, add the part's x,y. Pads: shape width x height; smd on the part's side, far side on the other; paste and mask are expansions set on the pad)
ANT3216_2.4GHz [mm] "Chip Antenna, 2-Leads, Body 3.20x1.60mm, IPC Medium Density"
  rect 0.4x1.8 smd: 1(-1.55,0) 2(1.55,0)
  silkscreen extent -1.58,-1.22 0.6,1.32, body extent -1.6,-0.8 1.6,0.8, height 1.3
AQFN40P700X700X85_HS-99N [mm] "AQFN, 98-Leads, Body 7.00x7.00mm, Pitch 0.40mm, Thermal Pad 5.4x5.0mm, IPC Medium Density"
  rect 5.4x5 smd paste-5 mask+0.05: 104(0.2,0)
  round 0.4 smd paste+0.012 mask+0.05: A1(-3.2,3.2) A31(3.2,3.2) AL1(-3.2,-3.2) AL31(3.2,-3.2)
  round 0.225 smd paste+0.012 mask+0.05: A5(-2.2,3.2) A13(-0.6,3.2) A15(-0.2,3.2) A17(0.2,3.2) A19(0.6,3.2) A21(1,3.2) A23(1.4,3.2) A25(1.8,3.2) A27(2.2,3.2) AA1(-3.2,-1) AA31(3.2,-1) AB2(-2.8,-1.2) AC1(-3.2,-1.4) AC31(3.2,-1.4) AD2(-2.8,-1.6) AE1(-3.2,-1.8) AE31(3.2,-1.8) AF2(-2.8,-2) AG1(-3.2,-2.2) AG31(3.2,-2.2) AH2(-2.8,-2.4) AJ1(-3.2,-2.6) AJ31(3.2,-2.6) AK2(-2.8,-2.8) AK4(-2.4,-2.8) AK6(-2,-2.8) AK8(-1.6,-2.8) AK10(-1.2,-2.8) AK12(-0.8,-2.8) AK14(-0.4,-2.8) AK16(0,-2.8) AK18(0.4,-2.8) AK20(0.8,-2.8) AK22(1.2,-2.8) AK24(1.6,-2.8) AK26(2,-2.8) AK28(2.4,-2.8) AK30(2.8,-2.8) AL3(-2.6,-3.2) AL5(-2.2,-3.2) AL7(-1.8,-3.2) AL9(-1.4,-3.2) AL11(-1,-3.2) AL13(-0.6,-3.2) AL15(-0.2,-3.2) AL17(0.2,-3.2) AL19(0.6,-3.2) AL21(1,-3.2) AL23(1.4,-3.2) AL25(1.8,-3.2) AL27(2.2,-3.2) AL29(2.6,-3.2) B2(-2.8,2.8) B4(-2.4,2.8) B6(-2,2.8) B8(-1.6,2.8) B10(-1.2,2.8) B12(-0.8,2.8) B14(-0.4,2.8) B16(0,2.8) B18(0.4,2.8) B20(0.8,2.8) B22(1.2,2.8) B24(1.6,2.8) B26(2,2.8) B28(2.4,2.8) B30(2.8,2.8) C1(-3.2,2.6) C31(3.2,2.6) D2(-2.8,2.4) E1(-3.2,2.2) E31(3.2,2.2) F2(-2.8,2) G1(-3.2,1.8) G31(3.2,1.8) H2(-2.8,1.6) J1(-3.2,1.4) J31(3.2,1.4) K2(-2.8,1.2) L1(-3.2,1) L31(3.2,1) M2(-2.8,0.8) N1(-3.2,0.6) N31(3.2,0.6) P2(-2.8,0.4) R1(-3.2,0.2) R31(3.2,0.2) T2(-2.8,0) U1(-3.2,-0.2) U31(3.2,-0.2) V2(-2.8,-0.4) W1(-3.2,-0.6) W31(3.2,-0.6) Y2(-2.8,-0.8)
  rrect50% 1.1x1 on Top Paste: ""(-1.75,1.8) ""(-1.75,-0.6) ""(-1.75,0.6) ""(-1.75,-1.8) ""(-0.45,1.8) ""(-0.45,0.6) ""(-0.45,-0.6) ""(-0.45,-1.8) ""(0.85,1.8) ""(0.85,-0.6) ""(0.85,0.6) ""(0.85,-1.8) ""(2.15,1.8) ""(2.15,-0.6) ""(2.15,0.6) ""(2.15,-1.8)
  silkscreen extent -4.23,-3.6 3.6,3.6, body extent -3.5,-3.5 3.5,3.5, height 0.85
CAP0805X13N [mm] "Chip Capacitor, 2-Leads, Body 2.00x1.25mm, IPC Medium Density"
  rect 1.2x1.4 smd: 1(-0.85,0) 2(0.85,0)
  silkscreen extent -1.78,-1.05 1.83,1.05, body extent -1.05,-0.67 1.05,0.67, height 1.35
CAPC0201X03N [mm] "Chip Capacitor, 2-Leads, Body 0.60x0.30mm, IPC Medium Density"
  rect 0.3x0.3 smd: 1(-0.3,0) 2(0.3,0)
  silkscreen extent -0.8,-0.5 0.8,0.48, body extent -0.32,-0.17 0.32,0.17, height 0.3
CAPC0402X06N [mm] "Chip Capacitor, 2-Leads, Body 1.00x0.50mm, IPC Medium Density"
  rect 0.66x0.62 smd: 1(-0.44,0) 2(0.44,0)
  silkscreen extent -1.03,-0.57 1.03,0.58, body extent -0.53,-0.28 0.53,0.27, height 0.55
CAPC0603X8N [mm]
  rect 0.6x0.9 smd: 1(-0.75,0) 2(0.75,0)
  silkscreen extent -1.35,-0.75 1.35,0.75, body extent -0.85,-0.45 0.85,0.45, height 0.91
CAPC0805X14N [mm] "Chip Capacitor, 2-Leads, Body 2.00x1.25mm, IPC Medium Density"
  rect 1.25x1.45 smd: 1(-0.85,0) 2(0.85,0)
  silkscreen extent -1.83,-1.07 1.83,1.07, body extent -1.08,-0.7 1.07,0.7, height 1.4
CAPC1206X18N [mm] "Chip Capacitor, 2-Leads, Body 3.20x1.60mm, IPC Medium Density"
  rect 1.35x1.8 smd: 1(-1.375,0) 2(1.375,0)
  silkscreen extent -2.37,-1.28 2.42,1.25, body extent -1.7,-0.9 1.7,0.9, height 1.8
CAPC1210X25N [mm] "Chip Capacitor, 2-Leads, Body 3.20x2.50mm, IPC Medium Density"
  rect 0.95x3.1 smd: 1(-1.925,0) 2(1.925,0)
  silkscreen extent -2.73,-1.9 2.78,1.9, body extent -1.64,-1.25 1.64,1.25, height 2.51
CAPD6.3XL5.8X61M [mm] "Polymer Aluminum Electrolytic Capacitor, Body 6.70x6.70x6.10mm, IPC Low Density"
  rect 3.5x1.85 smd: 1(-2.7,0) 2(2.7,0)
  silkscreen extent -3.4,-3.4 3.4,3.4, body extent -3.65,-3.3 3.65,3.3, height 6
CAPD6.3XL6.3X77M [mm] "Aluminum Electrolytic Capacitor, Body 6.60x6.60x7.70mm, IPC Low Density"
  rect 3.45x3.65 smd: 1(-2.7,0) 2(2.7,0)
  silkscreen extent -3.21,-3.4 3.4,3.4, body extent -3.65,-3.3 3.65,3.3, height 7.71
CAPD10XL11.1X10.2M [mm]
  rect 4.25x2.15 smd: 1(-4.25,0) 2(4.25,0)
  silkscreen extent -5.25,-5.25 5.25,5.25, body extent -5.5,-5.2 5.5,5.2, height 10.41
"CONN_2X5P_1.27MM - duplicate" [mm]
  round 0.8 hole 0.65: 1(0,0) 2(0,1.27) 3(1.27,0) 4(1.27,1.27) 5(2.54,0) 6(2.54,1.27) 7(3.81,0) 8(3.81,1.27) 9(5.08,0) 10(5.08,1.27)
  silkscreen extent -3.78,-2.36 8.86,3.18, body extent -3.87,-1.99 8.95,3.25, height 5.63
CRYOSC_3.2X2.5M [mm] "DFN, 4-Leads, Body 2.50x3.20mm, Pitch 1.70mm, IPC Medium Density"
  rect 1.4x1.2 smd: 1(-1.1,1.1) 2(-1.1,-1.1) 3(1.1,-1.1) 4(1.1,1.1)
  silkscreen extent -2.34,-2.05 1.98,2.05, body extent -1.6,-1.25 1.6,1.25, height 0.83
FB0603X08N [mm] "Chip Inductor, 2-Leads, Body 1.60x0.80mm, IPC Medium Density"
  rect 0.6x0.8 smd: 1(-0.7,0) 2(0.7,0)
  silkscreen extent -1.35,-0.75 1.35,0.74, body extent -0.88,-0.47 0.88,0.48, height 0.8
FB0805X12N [mm] "Chip Inductor, 2-Leads, Body 2.00x1.25mm, IPC Medium Density"
  rect 0.8x1.2 smd: 1(-0.9,0) 2(0.9,0)
  silkscreen extent -1.63,-0.92 1.65,0.92, body extent -1.1,-0.73 1.1,0.72, height 1.25
INDC0201 [mm] "Chip Inductor, 2-Leads, Body 0.60x0.30mm, IPC Medium Density"
  rect 0.3x0.3 smd: 1(-0.3,0) 2(0.3,0)
  silkscreen extent -0.8,-0.4 0.53,0.4, body extent -0.32,-0.17 0.32,0.17, height 0.3
INDC0603X08N [mm] "Chip Inductor, 2-Leads, Body 1.60x0.80mm, IPC Medium Density"
  rect 0.6x0.8 smd: 1(-0.7,0) 2(0.7,0)
  silkscreen extent -1.35,-0.75 1.35,0.75, body extent -0.88,-0.48 0.87,0.48, height 0.8
INDC2520X10N [mm] "Chip Inductor, 2-Leads, Body 2.50x2.00mm, IPC Medium Density"
  rect 0.7x2 smd: 1(-1.05,0) 2(1.05,0)
  silkscreen extent -1.75,-1.35 1.75,1.35, body extent -1.33,-1.07 1.32,1.08, height 1
INDC6060X45N [mm] "Chip Inductor, 2-Leads, Body 6.00x6.00mm, IPC Medium Density"
  rect 2.51x6.92 smd: 1(-2.545,0) 2(2.545,0)
  silkscreen extent -4.2,-3.8 4.15,3.83, body extent -3.04,-3.03 2.98,2.97, height 2.8
INDM7266X30N [mm] "Molded Inductor, 2-Leads, Body 7.20x6.60mm, IPC Medium Density"
  rect 2.55x3.4 smd: 1(-2.925,0) 2(2.925,0)
  silkscreen extent -3.7,-3.4 3.7,3.4, body extent -3.7,-3.4 3.7,3.4, height 3
JST_B2B_XH_A_GU [mm]
  rect 1.5x1.5 hole 1: 1(0,0)
  round 1.5 hole 1: 2(2.5,0)
  silkscreen extent -2.6,-3.6 5.18,2.53, body extent -2.4,-3.4 5,2.35, height 7.01
JST_GH_4_PIN [mm]
  rect 0.6x1.7 smd: 1(1.875,1.95) 2(0.625,1.95) 3(-0.625,1.95) 4(-1.875,1.95)
  rect 1x2.8 smd: 5(-3.725,-1.4) 6(3.725,-1.4)
  silkscreen extent -4.13,-2.5 4.14,3.22, body extent -4.15,-2.51 4.1,2.44, height 4.16
JST_GH_8_PIN [mm]
  rect 0.6x1.7 smd: 1(4.375,2.225) 2(3.125,2.225) 3(1.875,2.225) 4(0.625,2.225) 5(-0.625,2.225) 6(-1.875,2.225) 7(-3.125,2.225) 8(-4.375,2.225)
  rect 1x2.8 smd: 9(6.225,-1.125) 10(-6.225,-1.125)
  silkscreen extent -6.63,-2.22 6.63,3.6, body extent -6.63,-2.12 6.63,2.83, height 4.21
JST_S2P_VH [mm]
  rect 2.5x2.5 hole 1.65: 1(0,0)
  round 2.5 hole 1.65: 2(3.96,0)
  silkscreen extent -2,-5.7 6,1.88, body extent -1.96,-11.26 5.96,0.5, height 8.11
LED_0805_127P120X200-2N [mm] "Chip Array, Concave, 2-Leads, Pitch 1.27mm,  Body 1.20x2.00mm,  IPC Medium Density"
  rect 0.6x1.2 smd: 1(-0.8,0) 2(0.8,0)
  silkscreen extent -1.67,-0.9 1.4,0.9, body extent -1.01,-0.63 1.01,0.63, height 1.1
QFN50P400X400X100-25N-D [mm]
  rect 0.85x0.3 smd: 1(-1.95,1.25) 2(-1.95,0.75) 3(-1.95,0.25) 4(-1.95,-0.25) 5(-1.95,-0.75) 6(-1.95,-1.25) 13(1.95,-1.25) 14(1.95,-0.75) 15(1.95,-0.25) 16(1.95,0.25) 17(1.95,0.75) 18(1.95,1.25)
  rect 0.3x0.85 smd: 7(-1.25,-1.95) 8(-0.75,-1.95) 9(-0.25,-1.95) 10(0.25,-1.95) 11(0.75,-1.95) 12(1.25,-1.95) 19(1.25,1.95) 20(0.75,1.95) 21(0.25,1.95) 22(-0.25,1.95) 23(-0.75,1.95) 24(-1.25,1.95)
  rect 2.55x2.55 smd: 25(0,0)
  silkscreen extent -2.75,-2.74 2.74,2.74, body extent -2,-2 2,2, height 1
RECS0603X45N [mm]
  rect 0.6x0.9 smd: 1(-0.75,0) 2(0.75,0)
  silkscreen extent -1.3,-0.7 1.3,0.7, body extent -0.85,-0.44 0.85,0.46, height 0.56
SD_SMB_1A [mm] "Molded Diode, 2-Leads, Body 4.32x3.63mm, IPC Medium Density"
  rect 1.62x2.18 smd: 1(-2.11,0) 2(2.11,0)
  silkscreen extent -2.75,-1.88 3.3,1.88, body extent -2.68,-1.81 2.68,1.81, height 2.66
SOIC127P600X175-8N [mm]
  rect 1.525x0.65 smd: 1(-2.712,1.905) 2(-2.712,0.635) 3(-2.712,-0.635) 4(-2.712,-1.905) 5(2.712,-1.905) 6(2.712,-0.635) 7(2.712,0.635) 8(2.712,1.905)
  silkscreen extent -3.5,-2.45 1.33,2.6, body extent -3,-2.45 3,2.45, height 1.75
SOP65P490X110-9N [mm]
  rect 1.4x0.45 smd: 1(-2.2,0.975) 2(-2.2,0.325) 3(-2.2,-0.325) 4(-2.2,-0.975) 5(2.2,-0.975) 6(2.2,-0.325) 7(2.2,0.325) 8(2.2,0.975)
  rect 1.57x1.89 smd: 9(0,0)
  silkscreen extent -2.9,-1.35 1.17,1.55, body extent -2.45,-1.5 2.45,1.5, height 1.07
SOP65P640X120-20N [mm]
  rect 1.475x0.45 smd: 1(-2.938,2.925) 2(-2.938,2.275) 3(-2.938,1.625) 4(-2.938,0.975) 5(-2.938,0.325) 6(-2.938,-0.325) 7(-2.938,-0.975) 8(-2.938,-1.625) 9(-2.938,-2.275) 10(-2.938,-2.925) 11(2.938,-2.925) 12(2.938,-2.275) 13(2.938,-1.625) 14(2.938,-0.975) 15(2.938,-0.325) 16(2.938,0.325) 17(2.938,0.975) 18(2.938,1.625) 19(2.938,2.275) 20(2.938,2.925)
  silkscreen extent -3.67,-3.3 1.75,3.5, body extent -3.2,-3.25 3.2,3.25, height 1.13
SOP65P640X120-29N [mm]
  rect 1.475x0.45 smd: 1(-2.938,4.225) 2(-2.938,3.575) 3(-2.938,2.925) 4(-2.938,2.275) 5(-2.938,1.625) 6(-2.938,0.975) 7(-2.938,0.325) 8(-2.938,-0.325) 9(-2.938,-0.975) 10(-2.938,-1.625) 11(-2.938,-2.275) 12(-2.938,-2.925) 13(-2.938,-3.575) 14(-2.938,-4.225) 15(2.938,-4.225) 16(2.938,-3.575) 17(2.938,-2.925) 18(2.938,-2.275) 19(2.938,-1.625) 20(2.938,-0.975) 21(2.938,-0.325) 22(2.938,0.325) 23(2.938,0.975) 24(2.938,1.625) 25(2.938,2.275) 26(2.938,2.925) 27(2.938,3.575) 28(2.938,4.225)
  rect 2.34x3.04 smd: 29(0,0)
  silkscreen extent -3.98,-5.1 4.03,5.13, body extent -3.2,-4.85 3.2,4.85, height 1.2
SOT23_P240X110-3N [mm] "SOT23, 3-Leads, Body 2.95x2.40mm, Pitch 0.95mm, IPC Medium Density"
  rect 0.55x0.4 smd: 1(-1.4,0.95) 2(-1.4,-0.95) 3(1.4,0)
  silkscreen extent -1.72,-1.5 1.12,1.72, body extent -1.35,-1.5 1.15,1.5, height 1.11
SOT95P280X145-5N [mm] "TLV75533PDBVR"
  rect 1.2x0.6 smd: 1(-1.25,0.95) 2(-1.25,0) 3(-1.25,-0.95) 4(1.25,-0.95) 5(1.25,0.95)
  silkscreen extent -1.87,-1.45 0.3,1.6, body extent -1.4,-1.45 1.4,1.45, height 1.2
SW_PB_2 [mm] "SOIC, 2-Leads, Body 3.50x6.00mm, Pitch 1.27mm, IPC Medium Density"
  rect 1.75x1 smd: 1(-3.875,0) 2(3.875,0)
  silkscreen extent -4,-1.85 2.68,1.85, body extent -3.1,-1.85 3.1,1.85, height 1.75
TPS54202DDCR [mm]
  rect 1.25x0.6 smd: 1(-1.25,0.95) 2(-1.25,0) 3(-1.25,-0.95) 4(1.25,-0.95) 5(1.25,0) 6(1.25,0.95)
  silkscreen extent -1.88,-1.45 0.28,1.6, body extent -1.4,-1.45 1.4,1.45, height 1.1
USB_TYPE_A_FE [mm]
  round 1.5 hole 1: 1(-3.5,5.66) 2(-1,5.66) 3(1,5.66) 4(3.5,5.7)
  round 3.57 hole 2.38: 5(-7.07,2.95) 6(7.07,2.95)
  silkscreen extent -7.73,-7.35 8.05,7.35, body extent -7.8,-7.32 8,6.78, height 7.09

## Part data
ANT1: "C293767, ANT3216LL00R2400A, -40℃~+105℃ 1.2mm 1.6mm 160MHz 1W 2.45GHz 3.2mm 5.05dBi 50Ω 1206 Antennas ROHS", Supplier Part Number 1=ANT3216LL00R2400A, Supplier 1=Verical
C1 C7 C12 C13 C19: library part CC0402_1uF_X7R, "C307427, CL05B105KQ5NQNC, 1uF 6.3V X7R ±10% 0402 Multilayer Ceramic Capacitors MLCC - SMD/SMT ROHS", Supplier Part Number 1=CL05B105KQ5NQNC, Supplier 1="element14 APAC"
C2 C3 C4 C5 C8 C9 C10 C11 C18: library part CC0201_100nF_X7R, "C1882920, CC0201KRX7R5BB104, 100nF 6.3V X7R ±10% 0201 Multilayer Ceramic Capacitors MLCC - SMD/SMT ROHS", Supplier Part Number 1=CC0201KRX7R5BB104, Supplier 1="element14 APAC"
C6: library part CC0201_2.2nF_X7R, "C161488. GRM033R71E222KA12D, 2.2nF 25V X7R ±10% 0201 Multilayer Ceramic Capacitors MLCC - SMD/SMT ROHS", Supplier Part Number 1=GRM033R71E222KA12D, Supplier 1="element14 APAC"
C14 C15: library part CC0201_0.7pF_COG, "C907945, GJM0335C1ER70WB01D, 0.7pF 25V C0G 0201 Multilayer Ceramic Capacitors MLCC - SMD/SMT ROHS", Supplier Part Number 1=GJM0335C1ER70WB01D, Supplier 1="element14 APAC"
C16 C17 C34 C38: library part CC0805_4.7uF_X7R, "C354262, CC0805KKX7R8BB475, 25V 4.7uF X7R ±10% 0805 Multilayer Ceramic Capacitors MLCC - SMD/SMT ROHS", Supplier Part Number 1=CC0805KKX7R8BB475, Supplier 1="element14 APAC"
C20 C26 C27 C31: library part CC0603_100pF_X7R, "C14663 ,CC0603KRX7R9BB104, 100nF 50V X7R ±10% 0603 Multilayer Ceramic Capacitors MLCC - SMD/SMT ROHS", Supplier Part Number 1=CC0603KRX7R9BB104, Supplier 1=Avnet
C21 C25 C28 C30 C45 C47 C48 C49 C53 C56 C62: library part CC0805_10uF_X7R, "C95841, CL21B106KOQNNNE, 10uF 16V X7R ±10% 0805 Multilayer Ceramic Capacitors MLCC - SMD/SMT ROHS", Supplier Part Number 1=CL21B106KOQNNNE, Supplier 1=Avnet
C22 C29: library part CC0603_2.2nF_NPO, "C107043, CC0603JRNPO9BN222, 2.2nF 50V NP0 ±5% 0603 Multilayer Ceramic Capacitors MLCC - SMD/SMT ROHS", Supplier Part Number 1=CC0603JRNPO9BN222, Supplier 1="Arrow Electronics"
C23 C24: library part CC0805_2.2uF_X7R, "C19110 ,CL21B225KAFNNNE, 2.2uF 25V X7R ±10% 0805 Multilayer Ceramic Capacitors MLCC - SMD/SMT ROHS", Supplier Part Number 1=CL21B225KAFNNNE, Supplier 1=Avnet
C32 C40: library part CC0603_22pF_NPO, "C105620, CC0603JRNPO9BN220, 22pF 50V NP0 ±5% 0603 Multilayer Ceramic Capacitors MLCC - SMD/SMT ROHS", Supplier Part Number 1=CC0603JRNPO9BN220, Supplier 1="element14 APAC"
C33 C41 C51 C52: library part CC1210_22uF_X7R, "C309062, CL32B226KAJNNNE, 22uF 25V X7R ±10% 1210 Multilayer Ceramic Capacitors MLCC - SMD/SMT ROHS", Supplier Part Number 1=CL32B226KAJNNNE, Supplier 1=Avnet
C35: library part CC0603_4.7nF_X7R, "C106218, CC0603KRX7R9BB472, 4.7nF 50V X7R ±10% 0603 Multilayer Ceramic Capacitors MLCC - SMD/SMT ROHS", Supplier Part Number 1=CC0603KRX7R9BB472, Supplier 1="element14 APAC"
C36 C42 C43 C44 C46: library part CC0603_10nF_X7R, "C100042, CC0603KRX7R9BB103, 10nF 50V X7R ±10% 0603 Multilayer Ceramic Capacitors MLCC - SMD/SMT ROHS", Supplier Part Number 1=CC0603KRX7R9BB103, Supplier 1="element14 APAC"
C37: library part CC0603_220nF_NPO, "C464977, GRM31C5C1H224JE02L, 220nF 50V C0G ±5% 1206 Multilayer Ceramic Capacitors MLCC - SMD/SMT ROHS", Supplier Part Number 1=GRM31C5C1H224JE02L, Supplier 1="Chip One Stop"
C39 C50 C54 C57 C61 C63 C75 C81 C100 C105: library part CC0603_100nF_X7R, "C14663, CC0603KRX7R9BB104, 100nF 50V X7R ±10% 0603 Multilayer Ceramic Capacitors MLCC - SMD/SMT ROHS", Supplier Part Number 1=CC0603KRX7R9BB104, Supplier 1="element14 APAC"
C55: library part CC0603_75pF_NPO, "C282074, CC0603JRNPO9BN750, 50V 75pF NP0 ±5% 0603 Multilayer Ceramic Capacitors MLCC - SMD/SMT ROHS", Supplier Part Number 1=CC0603JRNPO9BN750, Supplier 1="element14 APAC"
C58 C60 C64 C87 C89 C91 C94 C95 C98 C108 C111 C112 C113: library part CC0805_1uF_X7R, "C28323, CL21B105KBFNNNE, 1uF 50V X7R ±10% 0805 Multilayer Ceramic Capacitors MLCC - SMD/SMT ROHS", Supplier Part Number 1=CL21B105KBFNNNE, Supplier 1="Future Electronics"
C59: library part CPD10XL10.2_470uF_ALUM, "C3350, RVT1V471M1010, -55℃~+105℃ 10.2mm 10mm 2000hrs@105℃ 35V 470uF ±20% SMD,D10xL10.2mm Aluminum Electrolytic Capacitors - SMD ROHS", Supplier Part Number 1=RVT1V471M1010, Supplier 1=UnikeyIC
C65 C66: library part CC1206_100nF_C0G, "C97946, GRM31C5C1H104JA01L, 100nF 50V C0G ±5% 1206 Multilayer Ceramic Capacitors MLCC - SMD/SMT ROHS", Supplier Part Number 1=GRM31C5C1H104JA01L, Supplier 1=TME
C67 C70 C71 C72 C73: library part CPD6.3XL5.8_10uF_POLYMER, "C5246550, HV1V106M0605PZ, -55℃~+105℃ 10uF 2.2mm 2000hrs 35V 5.8mm 6.3mm ±20% SMD,D6.3xL5.8mm Polymer Aluminum Capacitors ROHS", Supplier Part Number 1=C5246550, Supplier 1=LCSC
C68 C69: library part CC0805_390nF_X7R, "C1854267, CC0805KKX7R9BB394, 390nF 50V X7R ±10% 0805 Multilayer Ceramic Capacitors MLCC - SMD/SMT ROHS", Supplier Part Number 1=CC0805KKX7R9BB394, Supplier 1="element14 APAC"
C74 C80 C99 C104: library part CPD6.3XL7.7_100uF_POLY, "C5246554, HV1V107M0607PZ, -55℃~+105℃ 100uF 2.2mm 2000hrs 35V 6.3mm 7.7mm ±20% SMD,D6.3xL7.7mm Polymer Aluminum Capacitors ROHS", Supplier Part Number 1=C5246554, Supplier 1=LCSC
C76 C82 C101 C106: library part CC0603_1nF_X7R, "C100040, CC0603KRX7R9BB102, 1nF 50V X7R ±10% 0603 Multilayer Ceramic Capacitors MLCC - SMD/SMT ROHS", Supplier Part Number 1=CC0603KRX7R9BB102, Supplier 1="element14 APAC"
C77 C78 C85 C86 C92 C93 C96 C97: library part CC0603_1nF_NPO, "C106246, CC0603JRNPO9BN102, 1nF 50V NP0 ±5% 0603 Multilayer Ceramic Capacitors MLCC - SMD/SMT ROHS", Supplier Part Number 1=CC0603JRNPO9BN102, Supplier 1="element14 APAC"
C79 C102: library part CPD6.3XL7.7_220uF_POLY, "C5246541, HV1E227M0607PZ, -55℃~+105℃ 2.2mm 2000hrs 220uF 25V 6.3mm 7.7mm ±20% SMD,D6.3xL7.7mm Polymer Aluminum Capacitors ROHS", Supplier Part Number 1=C5246541, Supplier 1=LCSC
C83 C84 C88 C90: library part CC1206_220nF_NPO, "C464977, GRM31C5C1H224JE02L, 220nF 50V C0G ±5% 1206 Multilayer Ceramic Capacitors MLCC - SMD/SMT ROHS", Supplier Part Number 1=GRM31C5C1H224JE02L, Supplier 1="Chip One Stop"
C103 C110: library part CC1206_680nF_X7R, "C145012, CC1206KKX7R9BB684, 50V 680nF X7R ±10% 1206 Multilayer Ceramic Capacitors MLCC - SMD/SMT ROHS", Supplier Part Number 1=CC1206KKX7R9BB684, Supplier 1="element14 APAC"
C107 C109: library part CC1206_470nF_X7R, "C277483, CC1206KKX7R9BB474, 470nF 50V X7R ±10% 1206 Multilayer Ceramic Capacitors MLCC - SMD/SMT ROHS", Supplier Part Number 1=CC1206KKX7R9BB474, Supplier 1="element14 APAC"
FB1 FB2 FB4 FB5 FB6: library part FB0603_3A, "C107332, MPZ1608S101ATAH0, -55℃~+125℃ 1 100Ω@100MHz 30mΩ 3A ±25% 0603 Ferrite Beads ROHS", Supplier Part Number 1=MPZ1608S101ATAH0, Supplier 1="element14 APAC"
FB3 FB7: library part FB0805_6A, "C136227, MPZ2012S300AT000, -55℃~+125℃ 1 10mΩ 30Ω@100MHz 6A ±25% 0805 Ferrite Beads ROHS", Supplier Part Number 1=MPZ2012S300AT000, Supplier 1="element14 APAC"
IN1 IN2: library part IN2520_4.7uH_1A, "C91237, MLP2520S4R7MT0S1, 130mΩ 1A 4.7uH Multilayer inductor ±20% 1008 Inductors (SMD) ROHS", Supplier Part Number 1=MLP2520S4R7MT0S1, Supplier 1="element14 APAC"
IN3: library part IN7266_15uH_3A, "C5189959, CYA0630-15UH, 15uH 3.8A 3A 98mΩ ±20% SMD,7.2x6.6mm Inductors (SMD) ROHS", Supplier Part Number 1=C5189959, Supplier 1=LCSC
J1: "C42372547, HX JN1.27-2x5P ZZ H4.9, -40℃~+105℃ 1.27mm 1.27mm 1A 2 2x5P 5 500V Black Copper Gold IDC Header Through Hole Plugin,P=1.27mm IDC Connectors ROHS", Supplier Part Number 1=3220-10-0100-00, Supplier 1=Verical
J2: "C161692, BM04B-GHS-TBT(LF)(SN), -25℃~+85℃ 1 1.25mm 1A 1x4P 4 4.05mm 4.32mm 4P 50V 8.25mm Auxiliary Solder Pin GH PA9T Phosphor bronze Surface Mount,Vertical Tin UL94V-0 White SMD,P=1.25mm Wire To Board Connector ROHS", Supplier Part Number 1=ST74986991, Supplier 1=CoreStaff
J3: "C133062, BM08B-GHS-TBT(LF)(SN), -25℃~+85℃ 1 1.25mm 13.25mm 1A 1x8P 4.05mm 4.32mm 50V 8 8P Auxiliary Solder Pin GH PA9T Phosphor bronze Surface Mount,Vertical Tin UL94V-0 White SMD,P=1.25mm Wire To Board Connector ROHS", Supplier Part Number 1=BM08B-GHS-TBT(LF)(SN), Supplier 1="Future Electronics"
J4: "C456018, AF 90 WJDG, -25℃~+85℃ 1 1.5A 14mm 30V 4P 5,000 times Female Right Angle Type-A USB 2.0 White 弯插 USB Connectors ROHS", Supplier Part Number 1="AF 90 WJDG", Supplier 1=UnikeyIC
J5: "C160355, S2P-VH(LF)(SN), -25℃~+85℃ 1 10A 13.9mm 1x2P 2 250V 2P 3.96mm 7.86mm Brass PA66 Right Angle Tin UL94V-0 VH White 弯插,P=3.96mm Wire To Board Connector ROHS", Supplier Part Number 1=ST73514420, Supplier 1=CoreStaff
J6 J7 J8: "C265283, B2B-XH-A-GU, -25℃~+85℃ 1 1x2P 2 2.5mm 250V 2P 3A 5.75mm 7.4mm 7mm Brass Gold K Pin PA66 Through Hole UL94V-0 White XH 插件,P=2.5mm Wire To Board Connector ROHS", Supplier Part Number 1=B2B-XH-A-GU, Supplier 1=Verical
L1 L2: library part IN0603_10uH, "C76798, MLZ1608M100WT000, 1.05Ω 10uH 250mA 2MHz 90mA Multilayer inductor ±20% 0603 Inductors (SMD) ROHS", Supplier Part Number 1=MLZ1608M100WT000, Supplier 1="element14 APAC"
L3 L4: library part IN0201_2.2nH, "C98041, LQP03TN2N2B02D, 11GHz 14@500MHz 150mΩ 2.2nH 600mA Thick Film Inductor 0201 Inductors (SMD) ROHS", Supplier Part Number 1=LQP03TN2N2B02D, Supplier 1="element14 APAC"
L5: library part IN0201_1.5nH, "C77114, LQP03TN1N5B02D, 1.5nH 14@500MHz 150mΩ 15GHz 600mA Thick Film Inductor 0201 Inductors (SMD) ROHS", Supplier Part Number 1=LQP03TN1N5B02D, Supplier 1="Future Electronics"
L6 L7: library part IN0201_1.8nH, "C98040, LQP03TN1N8B02D, 1.8nH 14@500MHz 150mΩ 15GHz 600mA Thick Film Inductor 0201 Inductors (SMD) ROHS", Supplier Part Number 1=LQP03TN1N8B02D, Supplier 1="element14 APAC"
L8 L9: library part IN0606_10uH_2.7A, "C168076, FNR6045S100MT, 10uH 2.7A 3.5A 62mΩ Magnetic Shielded Inductor ±20% SMD,6x6mm Power Inductors ROHS"
LED1A LED1B LED1C LED1D: library part LED0805_YELLOW, "C965814, XL-2012UYC, 120° 2.3V 20mA 50mW 585nm~595nm 590nm Discrete Diode Top-mount Water Clear Yellow 0805 LED Indication - Discrete ROHS", Supplier Part Number 1=XL-2012UYC, Supplier 1=UnikeyIC
Q1A Q1B Q1C Q1D: library part SOT_23_AO3400A, "C347475, AO3400A, -55℃~+150℃ 1 N-channel 1.1V 1.4W 17mΩ@10V 30V 5.8A 77pF 823pF 9.7nC@4.5V 99pF SOT-23 MOSFETs ROHS", Supplier 1=UnikeyIC, Supplier Part Number 1=AO3400A
R1: library part REC0201_2.2_THICK, "C474415, RC0201JR-072R2L, -100ppm/℃~+350ppm/℃ -55℃~+125℃ 2.2Ω 25V 50mW Thick Film Resistor ±5% 0201 Chip Resistor - Surface Mount ROHS", Supplier Part Number 1=RC0201JR-072R2L, Supplier 1="element14 APAC"
R2A R2B R2C R2D: library part RESC0603_50_THIN, "C849792, RT0603BRE0750RL, -55℃~+155℃ 100mW 50Ω 75V Thin Film Resistor ±0.1% ±50ppm/℃ 0603 Chip Resistor - Surface Mount ROHS", Supplier Part Number 1=RT0603BRE0750RL, Supplier 1="element14 APAC"
R3A R3B R3C R3D R10: library part RESC0603_100_THIN, "C122970, RT0603BRD07100RL, -55℃~+155℃ 100mW 100Ω 75V Thin Film Resistor ±0.1% ±25ppm/℃ 0603 Chip Resistor - Surface Mount ROHS", Supplier Part Number 1=RT0603BRD07100RL, Supplier 1="element14 APAC"
R4A R4B R4C R4D R9 R12 R13 R17 R25 R28 R29 R30 R31 R39 R41 R44 R46 R48: library part RESC0603_100K_THIN, "C116674, AC0603FR-07100KL, -55℃~+155℃ 100kΩ 100mW 75V Thick Film Resistor ±1% ±100ppm/℃ 0603 Chip Resistor - Surface Mount ROHS", Supplier Part Number 1=AC0603FR-07100KL, Supplier 1="element14 APAC"
R5 R6: library part RESC0603_470_THIN, "C705857,RT0603BRE07470RL, -55℃~+155℃ 100mW 470Ω 75V Thin Film Resistor ±0.1% ±50ppm/℃ 0603 Chip Resistor - Surface Mount ROHS", Supplier Part Number 1=RT0603BRE07470RL, Supplier 1="Arrow Electronics"
R7 R11: library part RESC0603_510K_THICK, "C114066, RC0603FR-07510KL, -55℃~+155℃ 100mW 510kΩ 75V Thick Film Resistor ±1% ±100ppm/℃ 0603 Chip Resistor - Surface Mount ROHS", Supplier Part Number 1=RC0603FR-07510KL, Supplier 1="element14 APAC"